# EAGLE board Main Board v34 (EAGLE 9.7.0), part 1 of 2
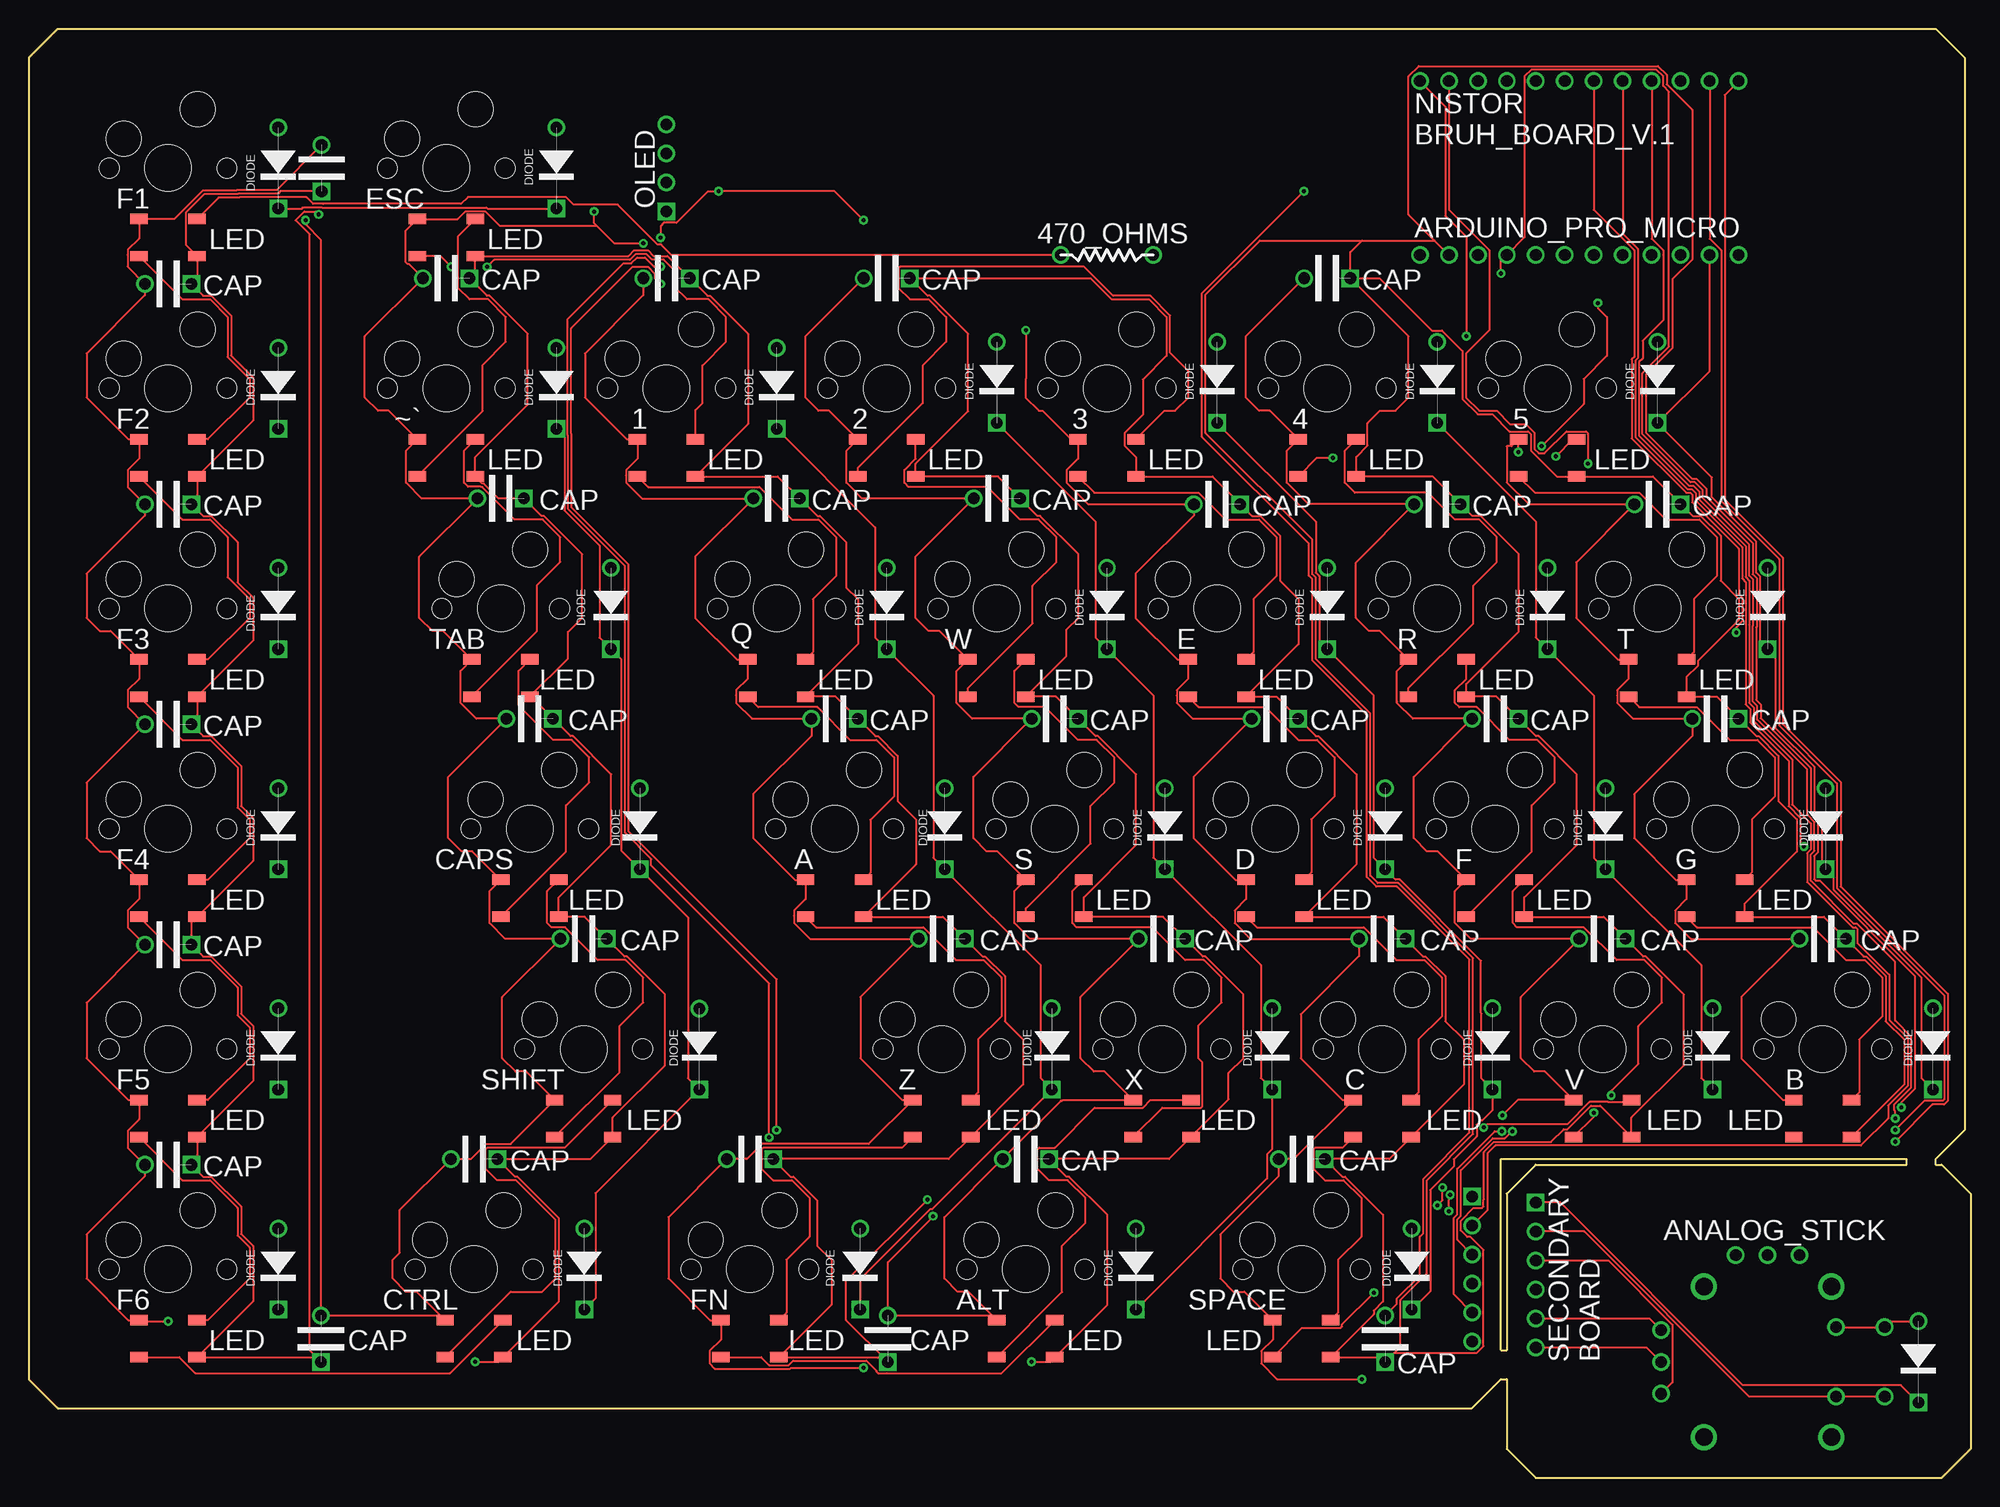
[diagram p0: board, top side]
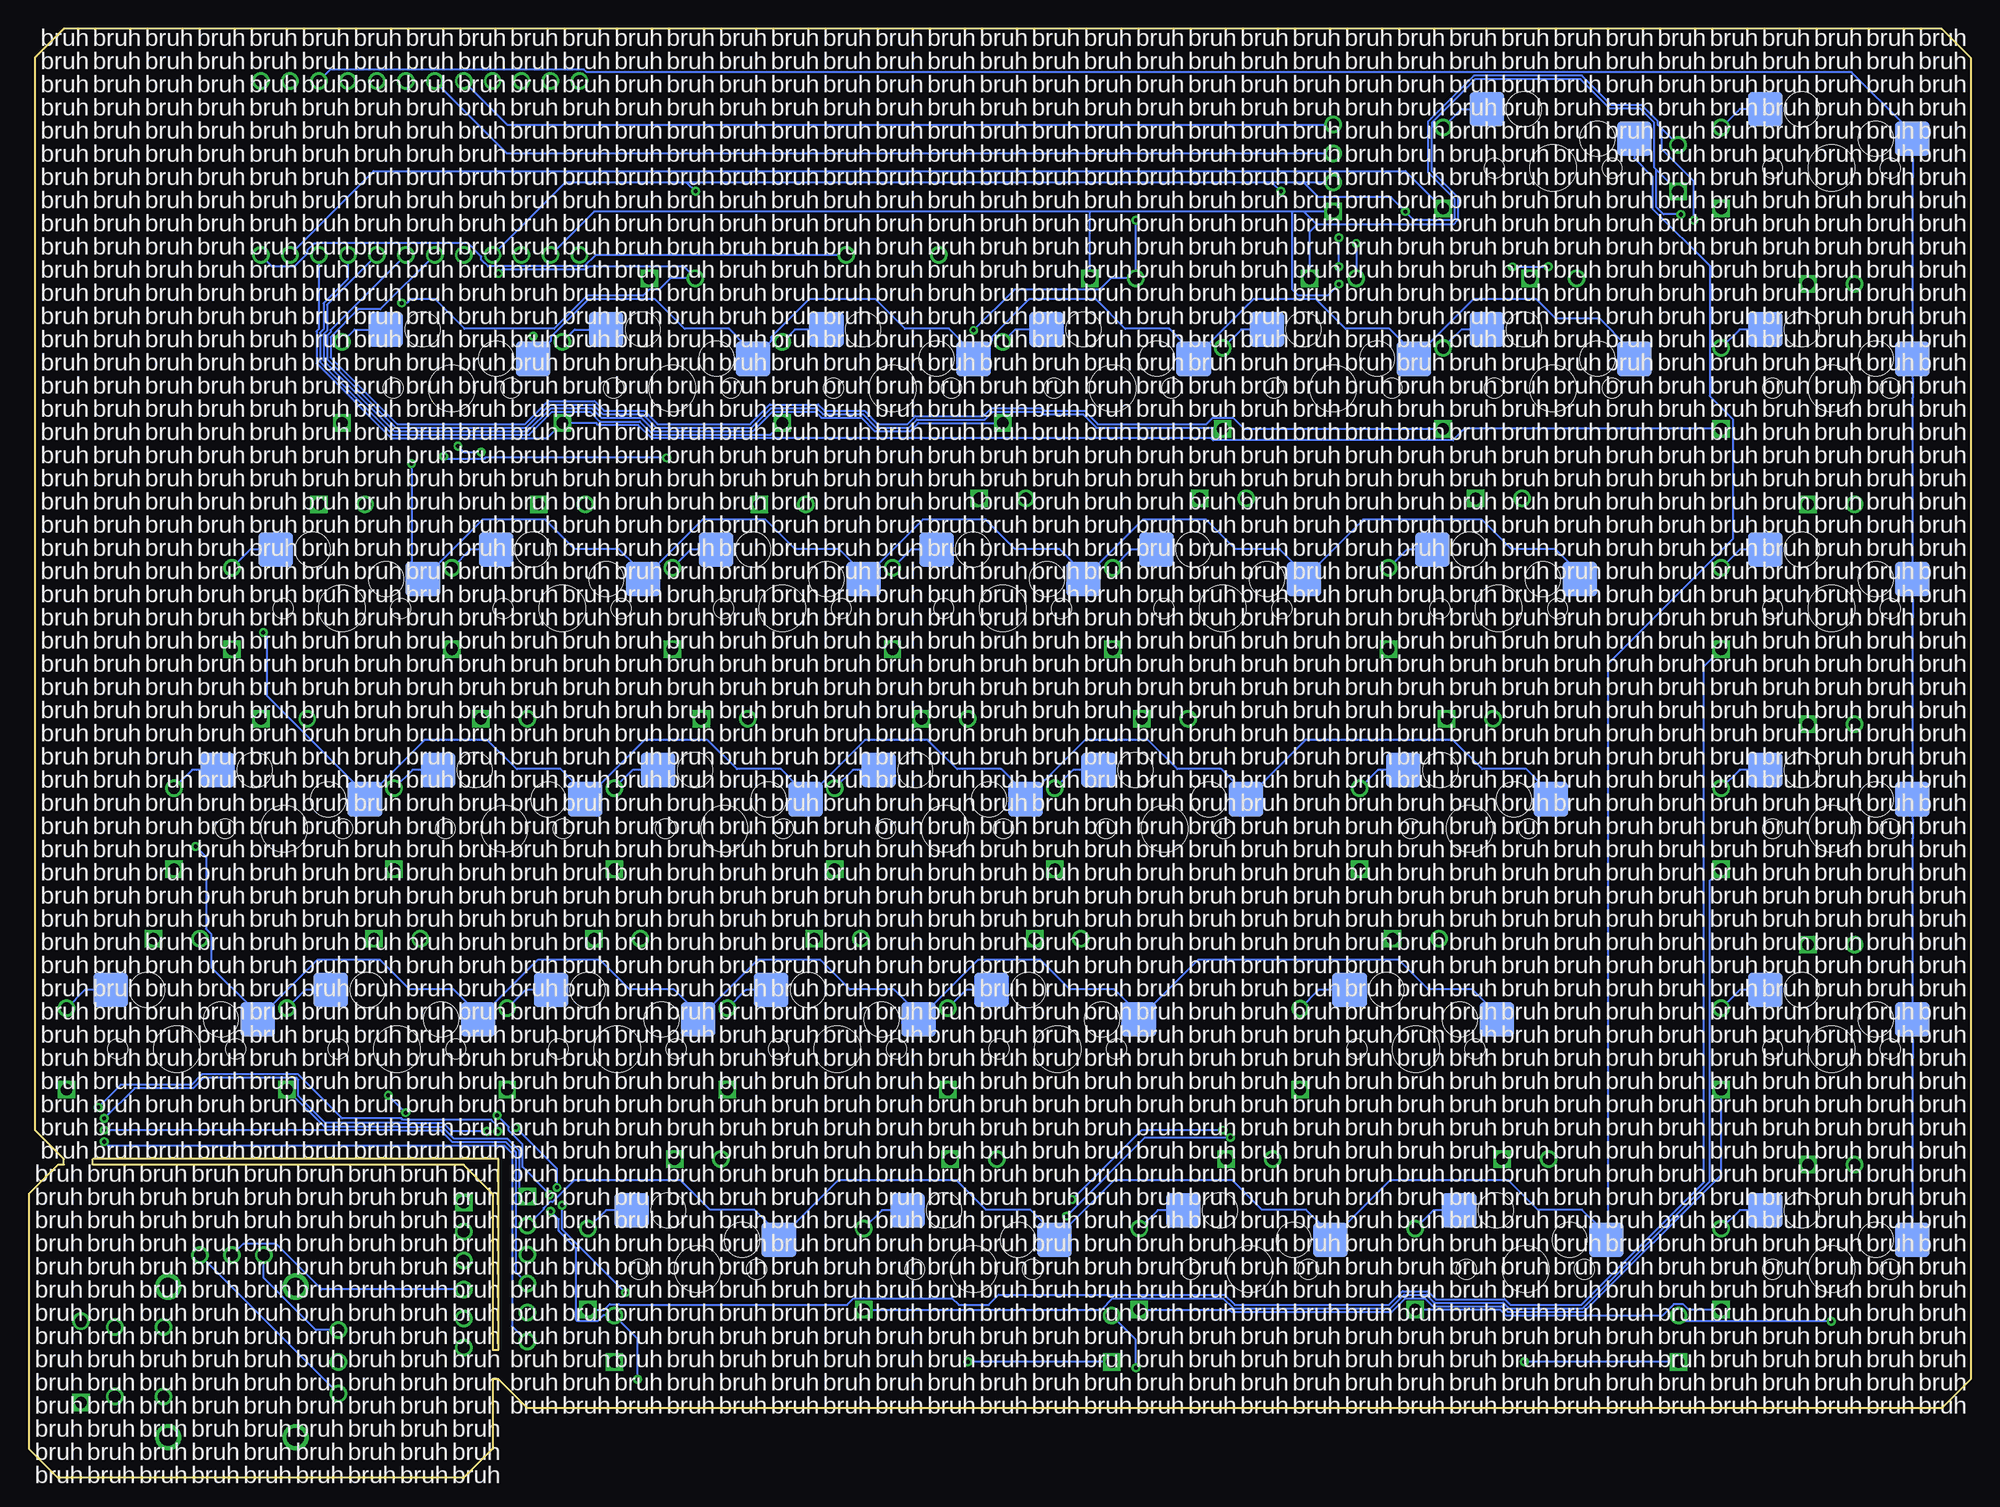
[diagram p1: board, bottom side, seen from below]

Size 167.5 x 125 mm. Coordinates in mm from the lower left corner, seen from the top.
Outline: 0,122.5 0,8.5 2.5,6 124.5,6 127,8.5 127.5,8.5 127.5,2.5 130,0 165,0 167.5,2.5 167.5,24.5 165,27 164.5,27 164.5,27.5 167,30 167,122.5 164.5,125 2.5,125 0,122.5
Outline: 127,11 127,27.5 162,27.5 162,27 130,27 127.5,24.5 127.5,11 127,11
Copper layers (1*16): Top / Bottom
Stack-up Default Layer Stack: Top User Defined 0.035mm / Dielectric-1 User Defined 1.5mm / Bottom User Defined 0.035mm
Design rules "default": minimum track width 6mil, minimum drill 0.35mm, track to track 6mil, track to pad 6mil, pad to pad 6mil, via to via 6mil, smd to smd 6mil, copper to edge 40mil, drill to drill 6mil, minimum pad ring 10mil, minimum via ring 8mil, stop-mask expansion 4mil, vias tented up to drill 0mil, thermal gap 10mil

## Footprints (pad centres in the part's own frame; a part is rotated, then mirrored left to right if it is on the bottom)
HOTSWAP_SWITCH = smd 3 x 3 bottom: LEFT -6.985,2.54; RIGHT 5.715,5.08 | hole 4: 0,0 | hole 1.7: 5.08,0; -5.08,0 | hole 3: 2.54,5.08; -3.81,2.54
ARDUINO_PRO_MICRO = drill 1: 7 22.5,0; A0/18 17.5,15; A1/19 15,15; A2/20 12.5,15; A3/21 10,15; A6/4 15,0; A7/PWM/6 20,0; A8/8 25,0; A9/PWM/9 27.5,0; A10/PWM/10 27.5,15; GND0 5,0; GND1 7.5,0; GND2 2.5,15; MISO/14 22.5,15; MOSI/16 25,15; PWM/5 17.5,0; RAW 0,15; RST 5,15; RX/0 2.5,0; SCL/PWM/3 12.5,0; SCLK/15 20,15; SDA/2 10,0; TX/1 0,0; VCC 7.5,15
ANALOG_STICK = drill 1: BTN1 -3,-5.9; BTN2 -3,-10.1; BTN3 3,-10.1; BTN4 3,-5.9; GND 9.2,2.75; GND1 2.75,9.2; VCC 9.2,-2.75; VCC1 -2.75,9.2; X_AXIS 0,9.2; Y_AXIS 9.2,0 | drill 1.5: P$12 -6.5,-5.5; P$13 6.5,-5.5; P$14 6.5,5.5; P$15 -6.5,5.5
CAPACITOR = drill 1: P$1 -2,0 | drill 1 square: P$2 2,0
DIODE = drill 1: ANNODE -3.5,0 | drill 1 square: CATHODE 3.5,0
5_PIN_HEADER = drill 1: P$1 0,-6.25; P$2 0,-3.75; P$3 0,-1.25; P$4 0,1.25; P$5 0,3.75 | drill 1 square: P$6 0,6.25
WS2812B = smd 1.5 x 0.9: DIN 2.5,1.6; DOUT -2.5,-1.6; GND 2.5,-1.6; VCC -2.5,1.6
RESISTOR = drill 1: P$1 -4,0; P$2 4,0
OLED_I2C = drill 1 square: GND 0,0 | drill 1: SCL 0,5; SDA 0,7.5; VCC 0,2.5

## Placement (x,y rotation side)
1  HOTSWAP_SWITCH  [HOTSWAP_SWITCH]  55,94 0 top
2  HOTSWAP_SWITCH  [HOTSWAP_SWITCH]  74,94 0 top
3  HOTSWAP_SWITCH  [HOTSWAP_SWITCH]  93,94 0 top
4  HOTSWAP_SWITCH  [HOTSWAP_SWITCH]  112,94 0 top
5  HOTSWAP_SWITCH  [HOTSWAP_SWITCH]  131,94 0 top
A  HOTSWAP_SWITCH  [HOTSWAP_SWITCH]  69.5,56 0 top
ALT  HOTSWAP_SWITCH  [HOTSWAP_SWITCH]  86,18 0 top
B  HOTSWAP_SWITCH  [HOTSWAP_SWITCH]  154.75,37 0 top
C  HOTSWAP_SWITCH  [HOTSWAP_SWITCH]  116.75,37 0 top
CAPS  HOTSWAP_SWITCH  [HOTSWAP_SWITCH]  43.2,56 0 top
CTRL  HOTSWAP_SWITCH  [HOTSWAP_SWITCH]  38.4,18 0 top
D  HOTSWAP_SWITCH  [HOTSWAP_SWITCH]  107.5,56 0 top
E  HOTSWAP_SWITCH  [HOTSWAP_SWITCH]  102.5,75 0 top
ESC  HOTSWAP_SWITCH  [HOTSWAP_SWITCH]  36,113 0 top
F  HOTSWAP_SWITCH  [HOTSWAP_SWITCH]  126.5,56 0 top
F1  HOTSWAP_SWITCH  [HOTSWAP_SWITCH]  12,113 0 top
F2  HOTSWAP_SWITCH  [HOTSWAP_SWITCH]  12,94 0 top
F3  HOTSWAP_SWITCH  [HOTSWAP_SWITCH]  12,75 0 top
F4  HOTSWAP_SWITCH  [HOTSWAP_SWITCH]  12,56 0 top
F5  HOTSWAP_SWITCH  [HOTSWAP_SWITCH]  12,37 0 top
F6  HOTSWAP_SWITCH  [HOTSWAP_SWITCH]  12,18 0 top
FN  HOTSWAP_SWITCH  [HOTSWAP_SWITCH]  62.2,18 0 top
G  HOTSWAP_SWITCH  [HOTSWAP_SWITCH]  145.5,56 0 top
NISTOR  [ARDUINO_PRO_MICRO]  120,120.5 180 bottom
Q  HOTSWAP_SWITCH  [HOTSWAP_SWITCH]  64.5,75 0 top
R  HOTSWAP_SWITCH  [HOTSWAP_SWITCH]  121.5,75 0 top
S  HOTSWAP_SWITCH  [HOTSWAP_SWITCH]  88.5,56 0 top
SHIFT  HOTSWAP_SWITCH  [HOTSWAP_SWITCH]  47.85,37 0 top
SPACE  HOTSWAP_SWITCH  [HOTSWAP_SWITCH]  109.8,18 0 top
T  HOTSWAP_SWITCH  [HOTSWAP_SWITCH]  140.5,75 0 top
TAB  HOTSWAP_SWITCH  [HOTSWAP_SWITCH]  40.7,75 0 top
U$1  ANALOG_STICK  [ANALOG_STICK]  150,10 90 top
U$2  CAPACITOR  [CAPACITOR]  25.25,113 270 top
U$4  CAPACITOR  [CAPACITOR]  12,103 0 top
U$5  CAPACITOR  [CAPACITOR]  12,84 0 top
U$6  CAPACITOR  [CAPACITOR]  12,65 0 top
U$7  CAPACITOR  [CAPACITOR]  12,46 0 top
U$8  DIODE  [DIODE]  45.5,94 270 top
U$9  DIODE  [DIODE]  50.2,75 270 top
U$10  DIODE  [DIODE]  52.7,56 270 top
U$11  DIODE  [DIODE]  57.83,36.99 270 top
U$12  DIODE  [DIODE]  47.9,18 270 top
U$13  DIODE  [DIODE]  21.5,18 270 top
U$14  CAPACITOR  [CAPACITOR]  12,27 0 top
U$15  CAPACITOR  [CAPACITOR]  25.2,12 270 top
U$16  CAPACITOR  [CAPACITOR]  38.4,27.5 0 top
U$17  CAPACITOR  [CAPACITOR]  47.85,46.5 0 top
U$18  CAPACITOR  [CAPACITOR]  43.2,65.5 0 top
U$19  CAPACITOR  [CAPACITOR]  40.7,84.5 0 top
U$20  DIODE  [DIODE]  64.5,94 270 top
U$21  DIODE  [DIODE]  74,75 270 top
U$22  DIODE  [DIODE]  79,56 270 top
U$23  DIODE  [DIODE]  88.25,37 270 top
U$24  DIODE  [DIODE]  71.7,18 270 top
U$25  DIODE  [DIODE]  21.5,37 270 top
U$26  CAPACITOR  [CAPACITOR]  36,103.5 0 top
U$27  CAPACITOR  [CAPACITOR]  55,103.5 0 top
U$28  CAPACITOR  [CAPACITOR]  64.5,84.5 0 top
U$29  CAPACITOR  [CAPACITOR]  69.5,65.5 0 top
U$30  CAPACITOR  [CAPACITOR]  78.75,46.5 0 top
U$31  CAPACITOR  [CAPACITOR]  62.2,27.5 0 top
U$32  DIODE  [DIODE]  83.5,94.5 270 top
U$33  DIODE  [DIODE]  93,75 270 top
U$34  DIODE  [DIODE]  98,56 270 top
U$35  DIODE  [DIODE]  107.25,37 270 top
U$36  DIODE  [DIODE]  95.5,18 270 top
U$37  DIODE  [DIODE]  21.5,56 270 top
U$38  CAPACITOR  [CAPACITOR]  74.1,12 270 top
U$39  CAPACITOR  [CAPACITOR]  86,27.5 0 top
U$40  CAPACITOR  [CAPACITOR]  97.75,46.5 0 top
U$41  CAPACITOR  [CAPACITOR]  88.5,65.5 0 top
U$42  CAPACITOR  [CAPACITOR]  83.5,84.5 0 top
U$43  CAPACITOR  [CAPACITOR]  74,103.5 0 top
U$44  DIODE  [DIODE]  102.5,94.5 270 top
U$45  DIODE  [DIODE]  112,75 270 top
U$46  DIODE  [DIODE]  117,56 270 top
U$47  DIODE  [DIODE]  126.25,37 270 top
U$48  DIODE  [DIODE]  119.3,18 270 top
U$49  DIODE  [DIODE]  21.5,75 270 top
U$50  CAPACITOR  [CAPACITOR]  102.5,84 0 top
U$51  CAPACITOR  [CAPACITOR]  107.5,65.5 0 top
U$52  CAPACITOR  [CAPACITOR]  116.75,46.5 0 top
U$53  CAPACITOR  [CAPACITOR]  109.8,27.5 0 top
U$54  5_PIN_HEADER  [5_PIN_HEADER]  124.5,18 0 top
U$55  CAPACITOR  [CAPACITOR]  117,12 270 top
U$56  DIODE  [DIODE]  121.5,94.5 270 top
U$57  DIODE  [DIODE]  131,75 270 top
U$58  DIODE  [DIODE]  136,56 270 top
U$59  DIODE  [DIODE]  145.25,37 270 top
U$60  DIODE  [DIODE]  163,10 270 top
U$61  DIODE  [DIODE]  21.5,94 270 top
U$62  CAPACITOR  [CAPACITOR]  135.75,46.5 0 top
U$63  CAPACITOR  [CAPACITOR]  126.5,65.5 0 top
U$64  CAPACITOR  [CAPACITOR]  121.5,84 0 top
U$65  CAPACITOR  [CAPACITOR]  112,103.5 0 top
U$66  CAPACITOR  [CAPACITOR]  140.5,84 0 top
U$67  CAPACITOR  [CAPACITOR]  145.5,65.5 0 top
U$68  DIODE  [DIODE]  140.5,94.5 270 top
U$69  DIODE  [DIODE]  150,75 270 top
U$70  DIODE  [DIODE]  155,56 270 top
U$71  DIODE  [DIODE]  164.25,37 270 top
U$72  DIODE  [DIODE]  45.5,113 270 top
U$73  DIODE  [DIODE]  21.5,113 270 top
U$74  CAPACITOR  [CAPACITOR]  154.75,46.5 0 top
U$75  WS2812B  [WS2812B]  12,107 0 top
U$76  WS2812B  [WS2812B]  12,88 0 top
U$77  WS2812B  [WS2812B]  12,69 0 top
U$78  WS2812B  [WS2812B]  12,50 0 top
U$79  WS2812B  [WS2812B]  12,31 0 top
U$80  WS2812B  [WS2812B]  12,12 0 top
U$81  WS2812B  [WS2812B]  38.4,12 0 top
U$82  WS2812B  [WS2812B]  47.85,31 0 top
U$83  WS2812B  [WS2812B]  43.2,50 0 top
U$84  WS2812B  [WS2812B]  40.7,69 0 top
U$85  WS2812B  [WS2812B]  36,88 0 top
U$86  WS2812B  [WS2812B]  36,107 0 top
U$87  WS2812B  [WS2812B]  55,88 0 top
U$88  WS2812B  [WS2812B]  64.5,69 0 top
U$89  WS2812B  [WS2812B]  69.5,50 0 top
U$90  WS2812B  [WS2812B]  78.75,31 0 top
U$91  WS2812B  [WS2812B]  62.2,12 0 top
U$92  WS2812B  [WS2812B]  86,12 0 top
U$93  WS2812B  [WS2812B]  97.75,31 0 top
U$94  WS2812B  [WS2812B]  88.5,50 0 top
U$95  WS2812B  [WS2812B]  83.5,69 0 top
U$96  WS2812B  [WS2812B]  74,88 0 top
U$97  WS2812B  [WS2812B]  93,88 0 top
U$98  WS2812B  [WS2812B]  102.5,69 0 top
U$99  WS2812B  [WS2812B]  107.5,50 0 top
U$100  WS2812B  [WS2812B]  116.75,31 0 top
U$101  WS2812B  [WS2812B]  109.8,12 0 top
U$102  WS2812B  [WS2812B]  135.75,31 0 top
U$103  WS2812B  [WS2812B]  126.5,50 0 top
U$104  WS2812B  [WS2812B]  121.5,69 0 top
U$105  WS2812B  [WS2812B]  112,88 0 top
U$106  WS2812B  [WS2812B]  131,88 0 top
U$107  WS2812B  [WS2812B]  140.5,69 0 top
U$108  WS2812B  [WS2812B]  145.5,50 0 top
U$109  WS2812B  [WS2812B]  154.75,31 0 top
U$110  RESISTOR  [RESISTOR]  93,105.5 180 top
U$111  OLED_I2C  [OLED_I2C]  55,109.25 0 top
U$112  5_PIN_HEADER  [5_PIN_HEADER]  130,17.5 0 top
V  HOTSWAP_SWITCH  [HOTSWAP_SWITCH]  135.75,37 0 top
W  HOTSWAP_SWITCH  [HOTSWAP_SWITCH]  83.5,75 0 top
X  HOTSWAP_SWITCH  [HOTSWAP_SWITCH]  97.75,37 0 top
Z  HOTSWAP_SWITCH  [HOTSWAP_SWITCH]  78.75,37 0 top
~  HOTSWAP_SWITCH  [HOTSWAP_SWITCH]  36,94 0 top

## Library data of the parts
1-5 A ALT B C CAPS CTRL D E ESC F F1-F6 FN G NISTOR Q R S SHIFT SPACE T TAB U$1 U$2 U$4-U$112 V W X Z ~ = Keyboard Parts Library

## Nets
N$1: U$8.ANNODE ~.RIGHT
N$2: TAB.RIGHT U$9.ANNODE
N$3: CAPS.RIGHT U$10.ANNODE
N$4: SHIFT.RIGHT U$11.ANNODE
N$5: CTRL.RIGHT U$12.ANNODE
N$6: F6.RIGHT U$13.ANNODE
N$7: 1.RIGHT U$20.ANNODE
N$8: Q.RIGHT U$21.ANNODE
N$9: A.RIGHT U$22.ANNODE
N$10: U$23.ANNODE Z.RIGHT
N$11: FN.RIGHT U$24.ANNODE
N$12: F5.RIGHT U$25.ANNODE
N$13: 2.RIGHT U$32.ANNODE
N$14: U$33.ANNODE W.RIGHT
N$15: S.RIGHT U$34.ANNODE
N$16: U$35.ANNODE X.RIGHT
N$17: ALT.RIGHT U$36.ANNODE
N$18: F4.RIGHT U$37.ANNODE
N$19: 3.RIGHT U$44.ANNODE
N$20: E.RIGHT U$45.ANNODE
N$21: D.RIGHT U$46.ANNODE
N$22: C.RIGHT U$47.ANNODE
N$23: SPACE.RIGHT U$48.ANNODE
N$24: F3.RIGHT U$49.ANNODE
N$25: 4.RIGHT U$56.ANNODE
N$26: R.RIGHT U$57.ANNODE
N$27: F.RIGHT U$58.ANNODE
N$28: U$59.ANNODE V.RIGHT
N$29: U$1.BTN1 U$1.BTN2 U$112.P$5
N$30: F2.RIGHT U$61.ANNODE
N$31: 5.RIGHT U$68.ANNODE
N$32: T.RIGHT U$69.ANNODE
N$33: G.RIGHT U$70.ANNODE
N$34: B.RIGHT U$71.ANNODE
N$35: ESC.RIGHT U$72.ANNODE
N$36: F1.RIGHT U$73.ANNODE
N$37: NISTOR.A2/20 U$8.CATHODE U$9.CATHODE U$10.CATHODE U$11.CATHODE U$12.CATHODE U$13.CATHODE
N$38: NISTOR.A1/19 U$20.CATHODE U$21.CATHODE U$22.CATHODE U$23.CATHODE U$24.CATHODE U$25.CATHODE
N$39: NISTOR.A0/18 U$32.CATHODE U$33.CATHODE U$34.CATHODE U$35.CATHODE U$36.CATHODE U$37.CATHODE
N$40: NISTOR.SCLK/15 U$44.CATHODE U$45.CATHODE U$46.CATHODE U$47.CATHODE U$48.CATHODE U$49.CATHODE
N$41: NISTOR.MISO/14 U$54.P$6 U$56.CATHODE U$57.CATHODE U$58.CATHODE U$59.CATHODE U$61.CATHODE
N$42: NISTOR.MOSI/16 U$68.CATHODE U$69.CATHODE U$70.CATHODE U$71.CATHODE U$72.CATHODE U$73.CATHODE
N$43: 1.LEFT 2.LEFT 3.LEFT 4.LEFT 5.LEFT NISTOR.TX/1 ~.LEFT
N$44: E.LEFT NISTOR.RX/0 Q.LEFT R.LEFT T.LEFT TAB.LEFT W.LEFT
N$45: A.LEFT CAPS.LEFT D.LEFT F.LEFT G.LEFT NISTOR.A6/4 S.LEFT
N$46: B.LEFT C.LEFT NISTOR.PWM/5 SHIFT.LEFT V.LEFT X.LEFT Z.LEFT
N$47: U$1.X_AXIS U$112.P$1
N$48: F1.LEFT F2.LEFT F3.LEFT F4.LEFT F5.LEFT F6.LEFT NISTOR.7
N$49: NISTOR.VCC U$2.P$1 U$4.P$1 U$5.P$1 U$6.P$1 U$7.P$1 U$14.P$1 U$15.P$1 U$16.P$1 U$17.P$1 U$18.P$1 U$19.P$1 U$26.P$1 U$27.P$1 U$28.P$1 U$29.P$1 U$30.P$1 U$31.P$1 U$38.P$1 U$39.P$1 U$40.P$1 U$41.P$1 U$42.P$1 U$43.P$1 U$50.P$1 U$51.P$1 U$52.P$1 U$53.P$1 U$54.P$4 U$55.P$1 U$62.P$1 U$63.P$1 U$64.P$1 U$65.P$1 U$66.P$1 U$67.P$1 U$74.P$1 U$75.VCC U$76.VCC U$77.VCC U$78.VCC U$79.VCC U$80.VCC U$81.VCC U$82.VCC U$83.VCC U$84.VCC U$85.VCC U$86.VCC U$87.VCC U$88.VCC U$89.VCC U$90.VCC U$91.VCC U$92.VCC U$93.VCC U$94.VCC U$95.VCC U$96.VCC U$97.VCC U$98.VCC U$99.VCC U$100.VCC U$101.VCC U$102.VCC U$103.VCC U$104.VCC U$105.VCC U$106.VCC U$107.VCC U$108.VCC U$109.VCC U$111.VCC
N$50: NISTOR.GND2 U$2.P$2 U$4.P$2 U$5.P$2 U$6.P$2 U$7.P$2 U$14.P$2 U$15.P$2 U$16.P$2 U$17.P$2 U$18.P$2 U$19.P$2 U$26.P$2 U$27.P$2 U$28.P$2 U$29.P$2 U$30.P$2 U$31.P$2 U$38.P$2 U$39.P$2 U$40.P$2 U$41.P$2 U$42.P$2 U$43.P$2 U$50.P$2 U$51.P$2 U$52.P$2 U$53.P$2 U$54.P$2 U$55.P$2 U$62.P$2 U$63.P$2 U$64.P$2 U$65.P$2 U$66.P$2 U$67.P$2 U$74.P$2 U$75.GND U$76.GND U$77.GND U$78.GND U$79.GND U$80.GND U$81.GND U$82.GND U$83.GND U$84.GND U$85.GND U$86.GND U$87.GND U$88.GND U$89.GND U$90.GND U$91.GND U$92.GND U$93.GND U$94.GND U$95.GND U$96.GND U$97.GND U$98.GND U$99.GND U$100.GND U$101.GND U$102.GND U$103.GND U$104.GND U$105.GND U$106.GND U$107.GND U$108.GND U$109.GND U$111.GND
N$51: U$75.DOUT U$76.DIN
N$52: U$76.DOUT U$77.DIN
N$53: U$77.DOUT U$78.DIN
N$54: U$78.DOUT U$79.DIN
N$55: U$79.DOUT U$80.DIN
N$56: U$80.DOUT U$81.DIN
N$57: U$81.DOUT U$82.DIN
N$58: U$82.DOUT U$83.DIN
N$59: U$83.DOUT U$84.DIN
N$60: U$84.DOUT U$85.DIN
N$61: U$85.DOUT U$86.DIN
N$62: U$86.DOUT U$87.DIN
N$63: U$87.DOUT U$88.DIN
N$64: U$88.DOUT U$89.DIN
N$65: U$89.DOUT U$90.DIN
N$66: U$90.DOUT U$91.DIN
N$67: U$91.DOUT U$92.DIN
N$68: U$92.DOUT U$93.DIN
N$69: U$93.DOUT U$94.DIN
N$70: U$94.DOUT U$95.DIN
N$71: U$95.DOUT U$96.DIN
N$72: U$96.DOUT U$97.DIN
N$73: U$97.DOUT U$98.DIN
N$74: U$98.DOUT U$99.DIN
N$75: U$99.DOUT U$100.DIN
N$76: U$100.DOUT U$101.DIN
N$77: U$101.DOUT U$102.DIN
N$78: U$102.DOUT U$103.DIN
N$79: U$103.DOUT U$104.DIN
N$80: U$104.DOUT U$105.DIN
N$81: U$105.DOUT U$106.DIN
N$82: U$106.DOUT U$107.DIN
N$83: U$107.DOUT U$108.DIN
N$84: U$108.DOUT U$109.DIN
N$85: U$75.DIN U$110.P$2
N$86: NISTOR.A10/PWM/10 U$110.P$1
N$87: NISTOR.SCL/PWM/3 U$111.SCL
N$88: NISTOR.SDA/2 U$111.SDA
N$89: ALT.LEFT CTRL.LEFT ESC.LEFT FN.LEFT NISTOR.A7/PWM/6 SPACE.LEFT U$54.P$5
N$90: U$1.GND U$1.GND1 U$112.P$2
N$91: NISTOR.A9/PWM/9 U$54.P$1
N$92: NISTOR.A8/8 U$54.P$3
N$93: U$1.Y_AXIS U$112.P$3
N$94: U$1.VCC U$1.VCC1 U$112.P$4
N$95: U$1.BTN3 U$1.BTN4 U$60.ANNODE
N$96: U$60.CATHODE U$112.P$6

## Tracks (layer width: path | path; a pad name or v marks a point on that pad's centre or on a via)
N$1
  Bottom 0.152: ~.RIGHT 43.92,99.08 U$8.ANNODE
N$2
  Bottom 0.152: TAB.RIGHT 48.62,80.08 U$9.ANNODE
N$3
  Bottom 0.152: CAPS.RIGHT 51.12,61.08 U$10.ANNODE
N$4
  Bottom 0.152: SHIFT.RIGHT 56.24,42.08 U$11.ANNODE
N$5
  Bottom 0.152: CTRL.RIGHT 46.32,23.08 U$12.ANNODE
N$6
  Bottom 0.152: F6.RIGHT 19.92,23.08 U$13.ANNODE
N$7
  Bottom 0.152: 1.RIGHT 62.92,99.08 U$20.ANNODE
N$8
  Bottom 0.152: Q.RIGHT 72.42,80.08 U$21.ANNODE
N$9
  Bottom 0.152: A.RIGHT 77.42,61.08 U$22.ANNODE
N$10
  Bottom 0.152: Z.RIGHT 86.67,42.08 U$23.ANNODE
N$11
  Bottom 0.152: FN.RIGHT 70.12,23.08 U$24.ANNODE
N$12
  Bottom 0.152: F5.RIGHT 19.92,42.08 U$25.ANNODE
N$13
  Bottom 0.152: 2.RIGHT 82.42,99.08 U$32.ANNODE
N$14
  Bottom 0.152: W.RIGHT 91.42,80.08 U$33.ANNODE
N$15
  Bottom 0.152: S.RIGHT 96.42,61.08 U$34.ANNODE
N$16
  Bottom 0.152: X.RIGHT 105.67,42.08 U$35.ANNODE
N$17
  Bottom 0.152: ALT.RIGHT 93.92,23.08 U$36.ANNODE
N$18
  Bottom 0.152: F4.RIGHT 19.92,61.08 U$37.ANNODE
N$19
  Bottom 0.152: 3.RIGHT 101.42,99.08 U$44.ANNODE
N$20
  Bottom 0.152: E.RIGHT 110.42,80.08 U$45.ANNODE
N$21
  Bottom 0.152: D.RIGHT 115.42,61.08 U$46.ANNODE
N$22
  Bottom 0.152: C.RIGHT 124.67,42.08 U$47.ANNODE
N$23
  Bottom 0.152: SPACE.RIGHT 117.72,23.08 U$48.ANNODE
N$24
  Bottom 0.152: F3.RIGHT 19.92,80.08 U$49.ANNODE
N$25
  Bottom 0.152: 4.RIGHT 120.42,99.08 U$56.ANNODE
N$26
  Bottom 0.152: R.RIGHT 129.42,80.08 U$57.ANNODE
N$27
  Bottom 0.152: F.RIGHT 134.42,61.08 U$58.ANNODE
N$28
  Bottom 0.152: V.RIGHT 143.67,42.08 U$59.ANNODE
N$29
  Top 0.152: U$1.BTN2 U$1.BTN1 148.43,7 134.18,21.25 U$112.P$5
N$30
  Bottom 0.152: F2.RIGHT 19.92,99.08 U$61.ANNODE
N$31
  Bottom 0.152: 5.RIGHT 139.42,99.08 U$68.ANNODE
N$32
  Bottom 0.152: T.RIGHT 148.42,80.08 U$69.ANNODE
N$33
  Bottom 0.152: G.RIGHT 153.42,61.08 U$70.ANNODE
N$34
  Bottom 0.152: B.RIGHT 162.67,42.08 U$71.ANNODE
N$35
  Bottom 0.152: ESC.RIGHT 43.92,118.08 U$72.ANNODE
N$36
  Bottom 0.152: F1.RIGHT 19.92,118.08 U$73.ANNODE
N$37
  Top 0.152: U$12.CATHODE 48.88,15.48 48.88,24.54 U$11.CATHODE 56.85,34.47 56.85,48.35 U$10.CATHODE 51.11,54.09 51.11,70.59 U$9.CATHODE 49.22,72.48 49.22,80.44 46.2,83.46 46.2,89.81 U$8.CATHODE
  Bottom 0.152: U$13.CATHODE 24.31,14.5 24.79,14.98 25.61,14.98 26.6,13.99 40.06,13.99 40.57,14.5 U$12.CATHODE | NISTOR.A2/20 137.19,100.81 139.08,100.81 141.48,98.41 141.48,96.66 135.73,90.91 124.72,90.91 122.73,92.9 118.72,92.9 117.88,92.06 114.43,92.06 113.28,90.91 105.29,90.91 103.6,92.59 99.42,92.59 98.88,92.06 95.43,92.06 94.28,90.91 91.72,90.91 91.02,91.61 85.15,91.61 84.47,92.29 80.11,92.29 79.88,92.06 76.43,92.06 75.28,90.91 65.92,90.91 65.35,91.48 63.65,91.48 62.67,90.5 U$8.CATHODE
N$38
  Top 0.152: U$20.CATHODE 73,82 73,72.5 U$21.CATHODE 78.02,67.48 78.02,53.48 U$22.CATHODE 87.27,44.23 87.27,34.48 U$23.CATHODE 77.93,23.18 77.75,23.18 71.7,17.13 U$24.CATHODE
  Bottom 0.152: U$24.CATHODE 63.94,14.5 63.73,14.3 49.93,14.3 48.75,15.48 47.05,15.48 46.37,14.81 40.44,14.81 39.93,14.3 33.34,14.3 21.5,26.14 U$25.CATHODE | NISTOR.A1/19 141.48,99.02 141.48,98.84 141.79,98.53 141.79,96.53 135.86,90.6 124.59,90.6 122.6,92.59 118.85,92.59 118.01,91.75 114.56,91.75 113.41,90.6 105.16,90.6 103.47,92.29 99.55,92.29 99.01,91.75 95.56,91.75 94.41,90.6 91.59,90.6 90.89,91.31 85.03,91.31 84.35,91.98 80.24,91.98 80.01,91.75 76.56,91.75 75.41,90.6 64.6,90.6 U$20.CATHODE
N$39
  Top 0.152: U$32.CATHODE 92.02,82.48 92.02,72.48 U$33.CATHODE 97,67.5 97,53.5 U$34.CATHODE 106.27,44.23 106.27,34.48 U$35.CATHODE 107.25,28.34 106.82,27.91 106.82,25.82 U$36.CATHODE
  Bottom 0.152: U$36.CATHODE 74.99,14.5 74.01,15.48 64.49,15.48 63.61,14.6 50.06,14.6 48.88,15.79 46.92,15.79 46.25,15.11 40.31,15.11 39.81,14.6 33.47,14.6 22.5,25.57 22.5,51.5 U$37.CATHODE | NISTOR.A0/18 141.79,101.21 141.79,98.96 142.09,98.66 142.09,96.4 135.99,90.3 124.46,90.3 122.47,92.29 118.98,92.29 118.14,91.45 114.68,91.45 113.53,90.3 105.03,90.3 103.35,91.98 99.67,91.98 99.14,91.45 95.68,91.45 94.53,90.3 91.47,90.3 90.77,91 U$32.CATHODE
N$40
  Top 0.152: U$44.CATHODE 111.02,82.48 111.02,78.09 111.32,77.79 111.32,72.18 U$45.CATHODE 116.02,67.48 116.02,53.48 U$46.CATHODE 117.89,51.61 118.25,51.61 125.27,44.59 125.27,40.09 125.31,40.06 125.31,34.44 U$47.CATHODE 126.25,31.7 125.37,30.82 125.25,30.82 124.89,30.47 124.89,29.47 122.91,27.49 122.91,26.86 120.89,24.84 120.89,16.09 U$48.CATHODE
  Bottom 0.152: U$48.CATHODE 117.89,14.5 117.41,14.98 116.59,14.98 116.52,14.91 96.92,14.91 96.35,15.48 95.52,15.48 95.5,15.5 87.87,15.5 87.28,14.91 84.72,14.91 83.84,15.79 64.36,15.79 63.48,14.91 50.19,14.91 49,16.09 46.8,16.09 46.12,15.41 40.19,15.41 39.68,14.91 33.59,14.91 23,25.5 23,70 U$49.CATHODE | NISTOR.SCLK/15 140,103.43 142.09,101.34 142.09,99.09 142.4,98.79 142.4,96.28 136.11,89.99 124.34,89.99 122.35,91.98 119.1,91.98 118.26,91.14 114.81,91.14 113.66,89.99 103.51,89.99 U$44.CATHODE
N$41
  Top 0.152: U$56.CATHODE 130,82.5 130,72.5 U$57.CATHODE 135.02,67.48 135.02,53.48 U$58.CATHODE 144.27,44.23 144.27,34.48 U$59.CATHODE
  Bottom 0.152: U$61.CATHODE 43.67,90.5 44.65,89.52 65.35,89.52 65.52,89.69 113.79,89.69 114.94,90.84 118.39,90.84 118.55,91 U$56.CATHODE 122.81,89.69 136.24,89.69 142.7,96.15 142.7,98.91 142.5,99.11 NISTOR.MISO/14 | U$59.CATHODE 142.06,30.31 135.53,30.31 135.5,30.28 131.85,30.28 130.85,29.28 126.26,29.28 125.22,28.24 125.22,24.97 U$54.P$6
N$42
  Top 0.152: U$71.CATHODE 163.27,34.48 163.27,43.16 155.68,50.75 155.68,51.82 U$70.CATHODE 154.65,52.85 154.65,56.83 154.02,57.47 154.02,61.35 150.68,64.69 150.68,70.82 U$69.CATHODE 149.35,72.15 149.35,77.76 149.02,78.09 149.02,80.79 145.19,84.61 145.19,86.31 U$68.CATHODE 145,95.5 NISTOR.MOSI/16 | U$73.CATHODE 23.57,109.5 23.68,109.61 25.25,109.61 25.27,109.58 39.47,109.58 39.55,109.5 U$72.CATHODE
  Bottom 0.152: NISTOR.MOSI/16 137.77,112.73 48.73,112.73 U$72.CATHODE
N$43  (via drill 0.35)
  Top 0.152: NISTOR.TX/1 122.19,118.31 122.19,108.87 124,107.07 v124,98.5
  Bottom 0.152: ~.LEFT 29.6,97.12 29.6,97.61 31.98,100 35.79,100 37.47,101.67 42.88,101.67 1.LEFT 48.6,97.12 48.6,97.61 50.12,99.13 53.93,99.13 56.47,101.67 61.88,101.67 2.LEFT 67.6,97.12 67.6,97.61 69.12,99.13 72.93,99.13 75.47,101.67 81.22,101.67 84.48,98.41 84.48,98.07 3.LEFT 86.6,97.12 86.6,97.61 88.12,99.13 91.93,99.13 94.47,101.67 100.22,101.67 103.48,98.41 103.48,98.07 4.LEFT 105.6,97.12 105.6,97.61 107.12,99.13 110.93,99.13 113.47,101.67 119.22,101.67 122.48,98.41 122.48,98.07 5.LEFT 124,96.56 v124,98.5
N$44  (via drill 0.35)
  Top 0.152: NISTOR.RX/0 122.5,109.39 125.98,105.91 125.98,99 123.98,96.99 123.98,93.2 125.12,92.06 126.63,92.06 127.78,90.91 129.15,90.91 129.89,90.16 129.89,88.75 130.25,88.39 130.75,88.39 132.64,90.28 134.34,90.28 134.48,90.15 134.48,90.02 134.5,90 v134.5,87.5
  Bottom 0.152: TAB.LEFT 34.3,78.12 34.3,78.61 35.82,80.13 39.63,80.13 42.17,82.67 52.38,82.67 Q.LEFT 58.1,78.12 58.1,78.61 59.62,80.13 63.43,80.13 65.97,82.67 71.38,82.67 W.LEFT 77.1,78.12 77.1,78.61 78.62,80.13 82.43,80.13 84.97,82.67 90.38,82.67 E.LEFT 96.1,78.12 96.1,78.61 97.62,80.13 101.43,80.13 103.97,82.67 109.38,82.67 R.LEFT 115.1,78.12 115.1,78.61 116.62,80.13 120.43,80.13 122.97,82.67 128.38,82.67 T.LEFT 134.1,78.12 134.1,78.61 134.5,79.02 v134.5,87.5
N$45  (via drill 0.35)
  Top 0.152: NISTOR.A6/4 135,109.39 138.48,105.91 138.48,96.71 138.28,96.5 138.28,89.66 142.96,84.98 143.35,84.98 143.48,84.85 143.48,84.16 147.49,80.16 147.49,76.26 147.83,75.93 147.83,73.9 147.28,73.35 v147.28,72.92
  Bottom 0.152: CAPS.LEFT 36.8,59.12 36.8,59.61 38.32,61.13 42.13,61.13 44.67,63.67 57.38,63.67 A.LEFT 63.1,59.12 63.1,59.61 64.62,61.13 68.43,61.13 70.97,63.67 76.38,63.67 S.LEFT 82.1,59.12 82.1,59.61 83.62,61.13 87.43,61.13 89.97,63.67 95.38,63.67 D.LEFT 101.1,59.12 101.1,59.61 102.62,61.13 106.43,61.13 108.97,63.67 114.38,63.67 F.LEFT 120.1,59.12 120.1,59.61 121.62,61.13 125.43,61.13 127.97,63.67 133.38,63.67 G.LEFT 139.1,59.12 139.1,59.61 146.98,67.5 146.98,72.62 v147.28,72.92
N$46  (via drill 0.35)
  Top 0.152: NISTOR.PWM/5 137.5,107.32 138.79,106.03 138.79,96.58 138.59,96.38 138.59,89.79 143.09,85.29 143.47,85.29 143.79,84.97 143.79,84.29 147.8,80.28 147.8,77.59 148.13,77.25 148.13,73.77 148.1,73.74 148.1,66.73 148.48,66.35 148.48,65.16 151.81,61.84 151.81,57.95 152.83,56.93 152.83,54.77 v153.13,54.47
  Bottom 0.152: SHIFT.LEFT 41.45,40.12 41.45,40.61 42.97,42.13 46.78,42.13 49.32,44.67 66.63,44.67 Z.LEFT 72.35,40.12 72.35,40.61 73.87,42.13 77.68,42.13 80.22,44.67 85.63,44.67 X.LEFT 91.35,40.12 91.35,40.61 92.87,42.13 96.68,42.13 99.22,44.67 104.63,44.67 C.LEFT 110.35,40.12 110.35,40.61 111.87,42.13 115.68,42.13 118.22,44.67 123.63,44.67 V.LEFT 129.35,40.12 129.35,40.61 130.87,42.13 134.68,42.13 137.22,44.67 142.63,44.67 B.LEFT 148.35,40.12 148.35,40.61 151.77,44.03 151.77,46.91 152.22,47.36 152.22,53.56 v153.13,54.47
N$47
  Top 0.152: U$112.P$1 139.55,11.25 U$1.X_AXIS
N$48
  Bottom 0.152: F6.LEFT 5.01,36.16 4.98,36.2 4.98,37.8 5.01,37.84 F5.LEFT 5.01,55.16 4.98,55.2 4.98,56.8 5.01,56.84 F4.LEFT 5.01,74.16 4.98,74.2 4.98,75.8 5.01,75.84 F3.LEFT 5.01,93.16 4.98,93.2 4.98,94.8 5.01,94.84 F2.LEFT 5.01,112.16 4.98,112.2 4.98,113.8 5.01,113.84 F1.LEFT 5.6,116.12 5.6,116.61 10.27,121.28 119.39,121.28 119.59,121.48 141.52,121.48 NISTOR.7
N$49  (via drill 0.35)
  Top 0.152: U$2.P$1 21.36,111.11 17.94,111.11 17.88,111.06 15,111.06 12.55,108.6 U$75.VCC 9.5,106.92 8.52,105.94 8.52,105.52 8.5,105.5 8.5,104.5 U$4.P$1 10,102.02 4.98,96.99 4.98,93.2 8.57,89.6 U$76.VCC 9.5,87.92 8.52,86.94 8.52,85.48 U$5.P$1 10,83.02 4.98,77.99 4.98,74.2 6.12,73.06 7.04,73.06 U$77.VCC 9.5,68.92 8.52,67.94 8.52,66.48 U$6.P$1 4.98,59.98 4.98,55.2 6.12,54.06 7.04,54.06 U$78.VCC 9.5,49.92 8.52,48.94 8.52,47.48 U$7.P$1 4.98,40.98 4.98,36.2 8.57,32.6 U$79.VCC 9.5,30.92 8.52,29.94 8.52,28.48 U$14.P$1 10,26.02 4.98,20.99 4.98,17.2 8.57,13.6 U$80.VCC 9.6,13.5 v12,13.5 | v161,31 161,31.64 160.93,31.71 160.93,32.22 162.38,33.67 162.38,38.06 161,39.44 161,44.51 157.72,47.79 157.45,47.79 153.71,51.53 153.71,53.76 154.04,54.09 154.04,56.58 153.41,57.21 153.41,61.1 149.09,65.42 149.09,66.6 148.71,66.98 148.71,73.49 148.74,73.52 148.74,77.51 148.41,77.84 148.41,80.53 144.4,84.54 144.4,85.23 143.73,85.9 143.34,85.9 139.19,90.04 139.19,95.31 141.48,97.59 141.48,119.59 140.98,120.09 140.98,120.91 140.41,121.48 129.59,121.48 129.02,120.91 129.02,107.02 NISTOR.VCC 127,105 v127,103.91 | v23.86,108.5 23.86,108.14 25.2,106.8 U$15.P$1 35.5,14 U$81.VCC 33.44,16.06 32.52,16.06 31.38,17.2 31.38,18.8 32,19.42 32,23.1 U$16.P$1 38.14,27.5 39.44,28.81 41.55,28.81 U$82.VCC 42.89,35.06 41.97,35.06 40.83,36.2 40.83,41.48 U$17.P$1 41.08,46.5 39.72,47.86 39.72,50.62 U$83.VCC 38.24,54.06 37.32,54.06 36.18,55.2 36.18,60.48 U$18.P$1 38.58,65.5 37.22,66.85 37.22,69.62 U$84.VCC 35.74,73.06 34.82,73.06 33.68,74.2 33.68,79.48 U$19.P$1 33.88,84.5 32.52,85.85 32.52,88.62 U$85.VCC 31.04,92.06 30.12,92.06 28.98,93.2 28.98,98.48 U$26.P$1 32.78,104.72 32.66,104.72 32.5,104.88 32.5,107.6 U$86.VCC 36.98,108.6 37.66,109.28 39.34,109.28 40.61,108.02 48.98,108.02
  Top 0.152: 48.98,108.02 48.75,108.25 v48.75,109.25 | U$27.P$1 53,102.02 47.98,96.99 47.98,93.2 51.57,89.6 U$87.VCC 52.5,87.92 51.52,86.94 51.52,86.52 51.5,86.5 51.52,86.48 51.52,85.85 52.88,84.5 U$28.P$1 57.48,79.48 57.48,74.2 61.07,70.6 U$88.VCC 62,68.92 61.02,67.94 61.02,67.52 61,67.5 61.02,67.48 61.02,66.85 62.38,65.5 U$29.P$1 67.5,64.02 62.48,58.99 62.48,55.2 66.07,51.6 U$89.VCC 67,49.92 66.02,48.94 66.02,48.52 66,48.5 66.02,48.48 66.02,47.86 67.38,46.5 U$30.P$1 71.73,41.48 71.73,36.2 75.32,32.6 U$90.VCC 72.44,28.79 63.23,28.79 61.94,27.5 U$31.P$1 55.18,22.48 55.18,17.2 58.77,13.6 U$91.VCC 59.7,11.92 58.72,10.94 58.72,9.86 59.16,9.42 65.67,9.42 65.74,9.49 v72,9.49 | v78,22.57 78,22.5 74.1,18.6 U$38.P$1 83.1,14 U$92.VCC 81.04,16.06 80.12,16.06 78.98,17.2 78.98,22.48 U$39.P$1 89.02,32.52 89.1,32.52 89.18,32.6 U$93.VCC 92.79,35.06 91.87,35.06 90.73,36.2 90.73,41.48 U$40.P$1 86.38,46.5 85.02,47.86 85.02,50.62 U$94.VCC 83.54,54.06 82.62,54.06 81.48,55.2 81.48,60.48 U$41.P$1 81.38,65.5 80.02,66.85 80.02,69.62 U$95.VCC 78.54,73.06 77.62,73.06 76.48,74.2 76.48,79.48 U$42.P$1 71.88,84.5 70.52,85.85 70.52,88.62 U$96.VCC 69.04,92.06 68.12,92.06 66.98,93.2 66.98,98.48 U$43.P$1 | v54.5,107 54.5,108 54.77,108.27 55.85,108.27 58.58,111 v59.5,111 69.5,111 v72,108.5 | v63.86,29.36 63.86,42.64 53.68,52.82 53.68,53.39 51.41,55.66 51.41,78.68 46.5,83.59 46.5,89.93 46.48,89.95 46.48,99.98 51.29,104.79 51.97,104.79 52.47,105.29 53.14,105.29 53.93,104.5 v54.5,104.5 | 48.98,108.02 50.5,106.5 v53,106.5 | v86,99 86,94.83 85.98,94.8 85.98,93.2 87.12,92.06 87.44,92.06 89.9,89.6 U$97.VCC 90.5,87.92 89.52,86.94 89.52,85.85 91.38,84 U$50.P$1 100.5,83.02 95.48,77.99 95.48,74.2 99.07,70.6 U$98.VCC 100,68.92 99.02,67.94 99.02,67.52 99,67.5 99.02,67.48 99.02,66.85 100.38,65.5 U$51.P$1 100.48,60.48 100.48,55.2 104.07,51.6 U$99.VCC 105,49.92 104.02,48.94 104.02,47.86 105.38,46.5 U$52.P$1 114.75,45.02 109.73,39.99 109.73,36.2 113.32,32.6 U$100.VCC 109.15,27.5 U$53.P$1 107.8,26.02 102.78,20.99 102.78,17.2 103.92,16.06 104.84,16.06 U$101.VCC 107.3,11.92 106.32,10.94 106.32,9.86 107.68,8.5 v115,8.5
  Top 0.152: U$55.P$1 118.01,15.01 118.01,15.47 119.98,17.44 119.98,20.79 120.28,21.09 120.28,25.78 124.28,29.78 124.28,44.72 118,51 116.24,51 115.41,51.83 115.41,65.83 110.71,70.53 110.71,77.54 110.41,77.84 110.41,80.59 101.21,89.79 101.21,102.21 v110,111 | U$54.P$4 123.21,20.54 123.21,22.28 123.52,22.59 123.52,26.53 126.27,29.29 127.33,29.29 127.92,29.89 v127.98,29.89 | v122.5,23 122.5,24 122.61,24.11 v122.61,24.41 | v127.11,31.28 128.44,32.6 U$102.VCC 130.79,35.06 129.87,35.06 128.73,36.2 128.73,41.48 U$62.P$1 124.38,46.5 123.02,47.86 123.02,50.62 U$103.VCC 121.54,54.06 120.62,54.06 119.48,55.2 119.48,60.48 U$63.P$1 119.38,65.5 118.02,66.85 118.02,66.98 118,67 118,69.6 U$104.VCC 116.54,73.06 115.62,73.06 114.48,74.2 114.48,78.98 U$64.P$1 110.38,84 108.52,85.85 108.52,88.62 U$105.VCC 107.04,92.06 106.12,92.06 104.98,93.2 104.98,98.48 U$65.P$1 | v135.36,101.36 135.36,100.93 136.13,100.15 136.13,96.8 134.14,94.8 134.14,92.64 v130.5,89 | v128.5,88.5 U$106.VCC 127.9,89 127.5,89 127.5,85.88 129.38,84 U$66.P$1 133.48,78.98 133.48,74.2 137.07,70.6 U$107.VCC 138,68.92 137.02,67.94 137.02,67.52 137,67.5 137.02,67.48 137.02,66.85 138.38,65.5 U$67.P$1 143.5,64.02 138.48,58.99 138.48,55.2 142.07,51.6 U$108.VCC 143,49.92 142.02,48.94 142.02,47.86 143.38,46.5 U$74.P$1 147.73,41.48 147.73,36.2 151.32,32.6 U$109.VCC
  Bottom 0.152: U$111.VCC 57.5,111.75 | 57.5,111.75 60.25,111.75 | 60.25,111.75 110.75,111.75 | 110.75,111.75 121.25,111.75 NISTOR.VCC | 57.5,111.75 56.25,110.5 50,110.5 v48.75,109.25 48.02,108.52 44.65,108.52 44.52,108.65 44.52,110.35 46.8,112.64 46.8,117.02 42.84,120.98 33.53,120.98 30.99,118.44 28.38,118.44 26.98,117.04 26.98,116.73 26.62,116.38 | U$2.P$1 26.62,116.38 | v161,31 158.4,33.6 153.34,33.6 152.46,34.48 144.4,34.48 144.27,34.35 144.27,32.95 141.93,30.61 135.4,30.61 135.38,30.59 131.73,30.59 131.02,29.89 v127.98,29.89 | v12,13.5 24.7,13.5 U$15.P$1 | 26.62,116.38 26.62,114.62 23.86,111.86 v23.86,108.5 | U$38.P$1 72,11.9 v72,9.49 | v54.5,104.5 v54.5,107 | v59.5,111 60.25,111.75 | v78,22.57 71.21,29.36 v63.86,29.36 | v53,106.5 U$27.P$1 | v72,108.5 U$43.P$1 74.17,103.5 75.15,102.52 82.48,102.52 v86,99 | v115,8.5 115,12 U$55.P$1 117.97,14 118.45,13.52 120.15,13.52 120.28,13.65 120.28,19.8 121.81,21.32 121.81,22.31 v122.5,23 | v110,111 110.75,111.75 | v122.61,24.41 122.61,24.5 124.92,26.81 124.92,28.77 126.11,29.96 126.11,30.27 v127.11,31.28 | v127,103.91 126.7,104.21 119.47,104.21 119.18,104.5 111,104.5 U$65.P$1 112.17,103.5 113.15,102.52 113.98,102.52 114.52,101.98 119.34,101.98 122.19,99.13 129.93,99.13 132.47,101.67 134.61,101.67 134.93,101.36 v135.36,101.36 | v130.5,89 130,88.5 v128.5,88.5
N$50  (via drill 0.35)
  Top 0.152: U$2.P$2 21.68,111 21.49,110.81 18.06,110.81 18.01,110.75 15.13,110.75 13.52,109.14 13.52,106.38 U$75.GND 14.5,103.5 U$4.P$2 15.02,101.98 15.74,101.98 17.44,100.28 17.44,96.82 19.33,94.93 19.33,91.23 U$76.GND 14.5,84.5 U$5.P$2 15.02,82.98 15.74,82.98 18,80.72 18,77.26 19.33,75.93 19.33,72.23 U$77.GND 14.5,65.5 U$6.P$2 15.02,63.98 15.74,63.98 18.3,61.41 18.3,57.95 19.33,56.93 19.33,53.23 U$78.GND 14,47.9 U$7.P$2 15.02,44.98 15.74,44.98 18.3,42.41 18.3,40.03 19.33,39 19.33,34.23 U$79.GND 14.5,27.5 U$14.P$2 15.02,25.98 15.74,25.98 18.3,23.41 18.3,21.03 19.33,20 19.33,15.23 U$80.GND 24.8,10.4 U$15.P$2 24.22,10.98 24.22,107.28 23,108.5 23.75,109.25 24.75,109.25 v25,109 | 121.25,106.75 119.02,108.98 119.02,120.91 119.9,121.79 140.53,121.79 141.29,121.03 141.29,120.21 143.48,118.02 143.48,105.09 141.79,103.4 141.79,97.47 139.5,95.18 139.5,90.17 143.47,86.2 143.85,86.2 144.7,85.35 144.7,84.67 148.71,80.66 148.71,77.97 149.05,77.63 149.05,73.39 149.02,73.36 149.02,67.11 149.4,66.73 149.4,65.54 153.71,61.23 153.71,57.34 154.34,56.71 154.34,53.96 154.02,53.64 154.02,51.65 154.15,51.52 154.48,51.52 162.69,43.31 162.69,33.54 161.53,32.39 v161.53,31.97 | 121.25,106.75 NISTOR.GND2 | v38.5,10 40.5,10 U$81.GND 45.73,15.23 45.73,22.39 42.14,25.98 41.92,25.98 U$16.P$2 48.45,27.5 U$82.GND 50.35,31.08 54.87,35.6 54.87,41.69 51.59,44.98 51.37,44.98 U$17.P$2 47.95,48.4 U$83.GND 45.7,50.08 50.22,54.6 50.22,60.69 46.94,63.98 46.72,63.98 U$18.P$2 43.3,67.4 U$84.GND 46.5,70.7 46.5,72.97 47.72,74.2 47.72,79.69 44.44,82.98 44.22,82.98 U$19.P$2 40.52,84.5 39.23,85.79 39.11,85.79 U$85.GND 38.5,88.08 43.02,92.6 43.02,98.69 39.74,101.98 39.52,101.98 U$26.P$2 38.5,104 U$86.GND 51.72,105.4 52.21,105.9 53.4,105.9 53.88,105.41 55.09,105.41 U$27.P$2 58.52,101.98 58.74,101.98 62.02,98.69 62.02,90.92 U$87.GND 64.6,86.4 U$28.P$2 68.02,82.98 68.24,82.98 70.5,80.72 70.5,76.83 71.52,75.8 71.52,71.92 U$88.GND 69.6,67.4 U$29.P$2 73.02,63.98 73.24,63.98 74.94,62.28 74.94,58.39 76.52,56.8 76.52,52.92 U$89.GND 78.85,48.4 U$30.P$2 82.27,44.98 82.49,44.98 84.19,43.28 84.19,39.39 85.77,37.8 85.77,33.92 U$90.GND 79.35,27.5 U$31.P$2 65.72,25.98 65.94,25.98 68,23.92 68,20.03 69.22,18.8 69.22,14.92 U$91.GND 73.7,10.4 U$38.P$2 70.5,13.6 70.5,17 v77.5,24
  Top 0.152: v64.5,30 64.5,43 51.72,55.78 51.72,78.8 46.8,83.72 46.8,90.06 46.79,90.08 46.79,99.18 52.09,104.48 53.41,104.48 53.98,103.91 53.98,103.52 v54.5,103 | v86.5,10 88.1,10 U$92.GND 93.02,14.92 93.02,22.69 89.74,25.98 89.52,25.98 U$39.P$2 98.35,27.5 U$93.GND 103.5,32.65 103.5,34.92 104.77,36.2 104.77,41.69 101.49,44.98 101.27,44.98 U$40.P$2 97.85,48.4 U$94.GND 91,50.08 95.52,54.6 95.52,60.69 92.24,63.98 92.02,63.98 U$41.P$2 88.6,67.4 U$95.GND 89.5,70.9 89.5,73.17 90.52,74.2 90.52,79.69 87.24,82.98 87.02,82.98 U$42.P$2 83.6,86.4 U$96.GND 76.5,87.49 81.02,92.01 81.02,98.69 77.74,101.98 77.52,101.98 U$43.P$2 91.57,103.5 93.4,101.67 96.61,101.67 98.13,100.15 98.13,96.8 96.09,94.76 96.09,91.72 94.52,90.15 94.52,89.06 95.5,88.08 U$97.GND 102.1,86.4 U$50.P$2 105.52,82.98 106.24,82.98 107.94,81.28 107.94,77.39 109.52,75.8 109.52,71.92 U$98.GND 107.6,67.4 U$51.P$2 111.02,63.98 111.24,63.98 114.52,60.69 114.52,52.92 U$99.GND 116.85,48.4 U$52.P$2 120.27,44.98 120.49,44.98 122.19,43.28 122.19,39.39 123.77,37.8 123.77,33.92 U$100.GND 117.35,27.5 U$53.P$2 113.32,25.98 113.54,25.98 116.82,22.69 116.82,15.21 116.02,14.41 116.02,14.12 U$101.GND 116.6,10.4 U$55.P$2 | U$55.P$2 118.32,11.32 118.32,15.35 120.59,17.62 120.59,25.66 124.59,29.66 124.59,44.84 118.13,51.31 116.36,51.31 115.71,51.96 115.71,65.96 111.02,70.65 111.02,77.66 110.71,77.97 110.71,80.96 101.52,90.15 101.52,102.09 106.18,106.75 115,106.75 | 115,106.75 121.25,106.75 | U$55.P$2 117.77,10.77 124.91,10.77 125.48,11.34 125.48,19.66 124.37,20.77 124.09,20.77 123.52,21.34 123.52,22.16 124.63,23.27 125.35,23.27 125.48,23.4 125.48,23.98 125.53,24.03 125.53,28.11 126.39,28.97 131.3,28.97 132.41,30.08 132.72,30.08 134.75,32.11 135.54,32.11 U$102.GND 138.25,31.08 142.77,35.6 142.77,41.69 139.49,44.98 139.27,44.98 U$62.P$2 135.85,48.4 U$103.GND 129,50.08 133.52,54.6 133.52,60.69 130.24,63.98 130.02,63.98 U$63.P$2 126.6,67.4 U$104.GND 124,68.49 128.52,73.01 128.52,79.69 125.24,82.98 124.52,82.98 U$64.P$2 121.1,86.4 U$105.GND 114.5,88.08 115.48,89.06 115.48,90.98 116.56,92.06 117.88,92.06 119.02,93.2 119.02,98.48 U$65.P$2
  Top 0.152: U$54.P$2 122.91,15.84 122.91,22.41 123.21,22.71 123.21,26.66 126.45,29.89 v127.08,29.89 | U$65.P$2 114,105.75 115,106.75 | U$65.P$2 116.5,103.5 121.02,98.98 121.91,98.98 123.67,97.22 123.67,93.07 124.99,91.75 126.25,91.75 127.72,90.28 129.34,90.28 129.59,90.03 129.59,88.62 131.81,86.4 U$106.GND 140.1,86.4 U$66.P$2 143.52,82.98 144.24,82.98 145.94,81.28 145.94,77.39 147.52,75.8 147.52,74.02 143.98,70.48 143.98,70.06 143,69.08 U$107.GND 145.6,67.4 U$67.P$2 149.02,63.98 149.24,63.98 150.94,62.28 150.94,58.39 152.52,56.8 152.52,54.02 148,49.5 U$108.GND 154.85,48.4 U$74.P$2 158.27,44.98 158.49,44.98 160.19,43.28 160.19,39.39 161.77,37.8 161.77,33.92 U$109.GND
  Bottom 0.152: U$111.GND 57.5,109.25 | 57.5,109.25 58.5,109.25 | 58.5,109.25 76,109.25 | 76,109.25 118.75,109.25 NISTOR.GND2 | U$2.P$2 27.12,112.88 | 27.12,112.88 27.29,113.04 27.29,116.91 28.5,118.13 31.12,118.13 33.66,120.67 42.72,120.67 46.48,116.91 46.48,116.52 46.5,116.5 46.5,112.76 44.21,110.47 44.21,108.53 44.61,108.12 56.38,108.12 | 56.38,108.12 57.5,109.25 | U$15.P$2 v38.5,10 | v25,109 26.5,109 27.12,109.62 27.12,112.88 | U$27.P$2 57,107.5 56.38,108.12 | v77.5,24 71.5,30 v64.5,30 | v54.5,103 55.5,102 58,102 58.5,102.5 58.5,109.25 | U$38.P$2 v86.5,10 | 76,109.25 U$43.P$2 | v127.08,29.89 127.08,30.36 127.61,30.89 135.25,30.89 135.36,31 140.49,31 144.28,34.79 152.59,34.79 153.47,33.91 159.59,33.91 v161.53,31.97
N$51
  Top 0.152: U$75.DOUT 13.23,101.67 15.61,101.67 17.13,100.15 17.13,96.69 19.02,94.8 19.02,93.2 15.43,89.6 U$76.DIN
N$52
  Top 0.152: U$76.DOUT 13.23,82.67 15.61,82.67 17.13,81.15 17.13,77.69 19.02,75.8 19.02,74.2 15.43,70.6 U$77.DIN
N$53
  Top 0.152: U$77.DOUT 13.23,63.67 15.61,63.67 18,61.29 18,57.83 19.02,56.8 19.02,55.2 15.43,51.6 U$78.DIN
N$54
  Top 0.152: U$78.DOUT 13.23,44.67 15.61,44.67 18,42.29 18,39.9 19.02,38.88 19.02,36.2 15.43,32.6 U$79.DIN
N$55
  Top 0.152: U$79.DOUT 13.23,25.67 15.61,25.67 18,23.29 18,20.9 19.02,19.88 19.02,17.2 15.43,13.6 U$80.DIN
N$56
  Top 0.152: U$80.DOUT 12.98,10.4 14.36,9.02 36.32,9.02 U$81.DIN
N$57
  Top 0.152: U$81.DOUT 41.56,16.06 44.28,16.06 45.42,17.2 45.42,22.26 42.01,25.67 40.4,25.67 39.42,26.65 39.42,28.35 39.57,28.5 46.25,28.5 U$82.DIN
N$58
  Top 0.152: U$82.DOUT 50.94,34.99 50.94,38.97 52.98,41.01 52.98,43.15 51.46,44.67 49.07,44.67 46.26,47.48 45.09,47.48 44.72,47.86 44.72,50.62 U$83.DIN
N$59
  Top 0.152: U$83.DOUT 46.34,54.04 46.34,58.01 48.33,60.01 48.33,62.15 46.81,63.67 45.2,63.67 42.22,66.65 42.22,69.62 U$84.DIN
N$60
  Top 0.152: U$84.DOUT 43.84,73.04 43.84,77.01 45.83,79.01 45.83,81.15 44.31,82.67 41.92,82.67 39.11,85.48 38.99,85.48 38.97,85.5 37.88,85.5 37.52,85.85 37.52,88.62 U$85.DIN
N$61
  Top 0.152: U$85.DOUT 39.14,92.04 39.14,96.01 41.13,98.01 41.13,100.15 39.61,101.67 38,101.67 37.02,102.65 37.02,107.12 U$86.DIN
N$62  (via drill 0.35)
  Top 0.152: U$87.DIN 57.5,92.13 58.09,92.72 58.09,95.97 60.13,98.01 60.13,100.15 58.61,101.67 56.76,101.67 55.61,102.82 55.61,104.25 54.75,105.11 53.76,105.11 53.27,105.59 52.34,105.59 51.84,105.09 40.14,105.09 v39.52,104.47 | v36.41,104.5 35.51,105.4 U$86.DOUT
  Bottom 0.152: v39.52,104.47 38.86,104.47 38.83,104.5 v36.41,104.5
N$63
  Top 0.152: U$87.DOUT 53.42,85.48 63.02,85.48 65.83,82.67 68.11,82.67 69.63,81.15 69.63,77.8 67.64,75.8 67.64,71.24 U$88.DIN
N$64
  Top 0.152: U$88.DOUT 62.92,66.48 68.02,66.48 70.83,63.67 73.11,63.67 74.63,62.15 74.63,58.8 72.59,56.76 72.59,52.19 U$89.DIN
N$65
  Top 0.152: U$89.DOUT 67.92,47.48 77.16,47.48 79.97,44.67 82.36,44.67 83.88,43.15 83.88,39.8 81.89,37.8 81.89,33.24 U$90.DIN
N$66
  Top 0.152: U$90.DOUT 75.33,28.48 63.35,28.48 63.22,28.35 63.22,26.65 64.2,25.67 65.81,25.67 67.33,24.15 67.33,20.8 65.34,18.8 65.34,14.24 U$91.DIN
N$67
  Top 0.152: U$91.DOUT 63.18,10.4 63.85,9.72 65.55,9.72 65.92,10.09 72.25,10.09 73.12,9.23 73.12,9.15 73.25,9.02 73.98,9.02 74,9 83.9,9 U$92.DIN
N$68
  Top 0.152: U$92.DOUT 89.14,16.04 89.14,20.01 91.13,22.01 91.13,24.15 89.61,25.67 88,25.67 87.02,26.65 87.02,28.35 87.15,28.48 88.5,28.48 91.94,31.92 96.09,31.92 96.77,32.6 U$93.DIN
N$69
  Top 0.152: U$93.DOUT 97.77,31.92 101.09,31.92 101.23,32.06 101.23,35.86 100.89,36.2 100.89,39.01 102.88,41.01 102.88,43.15 101.36,44.67 99.75,44.67 96.92,47.5 90.38,47.5 90.02,47.86 90.02,50.62 U$94.DIN
N$70
  Top 0.152: U$94.DOUT 86,49.13 91.59,54.72 91.59,57.97 93.63,60.01 93.63,62.15 92.11,63.67 90.5,63.67 87.67,66.5 85.38,66.5 85.02,66.85 85.02,69.62 U$95.DIN
N$71
  Top 0.152: U$95.DOUT 81,68.13 86.59,73.72 86.59,76.97 88.63,79.01 88.63,81.15 87.11,82.67 85.5,82.67 82.69,85.48 75.89,85.48 75.52,85.85 75.52,86.94 76.5,87.92 U$96.DIN
N$72
  Top 0.152: U$96.DOUT 71.5,87.13 77.09,92.72 77.09,95.97 79.13,98.01 79.13,100.15 77.61,101.67 76,101.67 75.02,102.65 75.02,104.35 75.15,104.48 91.02,104.48 93.52,101.98 96.74,101.98 98.44,100.28 98.44,97.06 100.02,95.48 100.02,93.2 98.88,92.06 97.96,92.06 U$97.DIN
N$73
  Top 0.152: U$97.DOUT 91.92,84.98 100.91,84.98 103.22,82.67 106.11,82.67 107.63,81.15 107.63,77.8 105.64,75.8 105.64,71.24 U$98.DIN
N$74
  Top 0.152: U$98.DOUT 100.9,66.5 106.67,66.5 109.5,63.67 111.11,63.67 112.63,62.15 112.63,58.8 110.64,56.8 110.64,52.24 U$99.DIN
N$75
  Top 0.152: U$99.DOUT 105.92,47.48 115.16,47.48 117.97,44.67 120.36,44.67 121.88,43.15 121.88,39.8 119.89,37.8 119.89,33.24 U$100.DIN
N$76
  Top 0.152: U$100.DOUT 113.33,28.48 110.95,28.48 110.82,28.35 110.82,26.65 111.8,25.67 113.41,25.67 114.93,24.15 114.93,20.8 112.94,18.8 112.94,14.24 U$101.DIN
N$77  (via drill 0.35)
  Top 0.152: U$101.DOUT 109.82,12.92 113.14,12.92 113.28,13.06 113.28,13.22 v116.03,15.97 | v121.5,23.5 121.95,23.95 v121.95,25.05 | v125.5,30.22 125.78,30.5 132.71,30.5 134.62,32.41 136.23,32.41 136.25,32.39 138.04,32.39 U$102.DIN
  Bottom 0.152: v116.03,15.97 121.5,21.45 v121.5,23.5 | v121.95,25.05 121.95,26.67 v125.5,30.22
N$78  (via drill 0.35)
  Top 0.152: U$102.DOUT 135,31.15 v135,31.5 | v136.5,33 136.5,33.38 138.84,35.72 138.84,38.97 140.88,41.01 140.88,43.15 139.36,44.67 136.97,44.67 134.14,47.5 128.38,47.5 128.02,47.86 128.02,50.62 U$103.DIN
  Bottom 0.152: v135,31.5 v136.5,33
N$79
  Top 0.152: U$103.DOUT 129.64,54.04 129.64,58.01 131.63,60.01 131.63,62.15 130.11,63.67 127.72,63.67 124.91,66.48 123.39,66.48 123.02,66.85 123.02,67.94 124,68.92 U$104.DIN
N$80
  Top 0.152: U$104.DOUT 119,68.13 124.59,73.72 124.59,76.97 126.63,79.01 126.63,81.15 125.11,82.67 123,82.67 120.67,85 114.38,85 113.52,85.85 113.52,88.62 U$105.DIN
N$81  (via drill 0.35)
  Top 0.152: U$105.DOUT 111.1,88 v112.5,88 | U$106.DIN 133.21,89.6 v131.73,88.13
  Bottom 0.152: v112.5,88 128.14,88 128.25,87.89 131.5,87.89 v131.73,88.13
N$82
  Top 0.152: U$106.DOUT 129.92,84.98 138.91,84.98 141.22,82.67 144.11,82.67 145.63,81.15 145.63,77.8 143.64,75.8 143.64,71.24 U$107.DIN
N$83
  Top 0.152: U$107.DOUT 138.92,66.48 143.91,66.48 146.72,63.67 149.11,63.67 150.63,62.15 150.63,58.8 148.64,56.8 148.64,52.24 U$108.DIN
N$84
  Top 0.152: U$108.DOUT 143.9,47.5 153.92,47.5 156.75,44.67 158.36,44.67 159.88,43.15 159.88,39.8 157.89,37.8 157.89,33.24 U$109.DIN
N$85
  Top 0.152: U$75.DIN 16.35,110.45 18.14,110.45 18.17,110.48 23.94,110.48 24.51,109.91 25.38,109.91 37.28,109.91 37.87,110.5 45.5,110.5 45.52,110.48 46.35,110.48 46.97,109.86 50.78,109.86 54.25,106.39 54.54,106.39 55.43,105.5 U$110.P$2
N$86
  Bottom 0.152: U$110.P$1 118.61,105.5 119.59,104.52 127.91,104.52 128.48,105.09 128.48,105.37 129.61,106.5 142.5,106.5 142.52,106.48 142.91,106.48 143.48,105.91 143.48,105.63 144.61,104.5 146.5,104.5 NISTOR.A10/PWM/10
N$87
  Bottom 0.152: U$111.SCL 126.25,114.25 NISTOR.SCL/PWM/3
N$88
  Bottom 0.152: U$111.SDA 126.25,116.75 NISTOR.SDA/2
N$89
  Top 0.152: NISTOR.A7/PWM/6 140,106.89 140.98,105.91 140.98,105.52 141,105.5 141,99.89 139.21,98.1 139.21,96.58 138.89,96.25 138.89,89.92 143.21,85.59 143.6,85.59 144.09,85.1 144.09,84.42 148.1,80.41 148.1,77.71 148.44,77.38 148.44,73.64 148.41,73.62 148.41,66.85 148.79,66.47 148.79,65.29 152.11,61.97 152.11,58.08 153.74,56.45 153.74,54.22 153.41,53.89 153.41,51.4 157.32,47.48 157.6,47.48 157.73,47.35 157.73,46.17 160.49,43.41 160.49,39.52 162.08,37.93 162.08,33.8 160.39,32.11 160.39,31.02 158.04,28.67 126.52,28.67 125.83,27.98 125.83,23.08 U$54.P$5
  Bottom 0.152: ESC.LEFT 29.02,113.84 27.43,112.26 27.43,109.5 22.5,104.57 22.5,93.33 20.52,91.35 20.52,90.52 20.5,90.5 20.5,81 31.29,70.21 31.29,20.67 CTRL.LEFT 32,21.12 32,21.61 33.52,23.13 37.33,23.13 39.87,25.67 50.08,25.67 FN.LEFT 55.8,21.12 55.8,21.61 57.32,23.13 61.13,23.13 63.67,25.67 73.88,25.67 ALT.LEFT 79.6,21.12 79.6,21.61 81.12,23.13 84.93,23.13 87.47,25.67 97.68,25.67 SPACE.LEFT 103.4,21.12 103.4,21.61 104.92,23.13 108.73,23.13 111.27,25.67 120.47,25.67 122.34,23.8 122.56,23.8 123.11,23.25 123.11,23.14 U$54.P$5
N$90
  Top 0.152: U$112.P$2 139.8,13.75 U$1.GND1
  Bottom 0.152: U$1.GND1 142.75,12.75 147.25,17.25 U$1.GND
N$91  (via drill 0.35)
  Top 0.152: NISTOR.A9/PWM/9 146.29,119.29 146.29,84.38 151.29,79.38 151.29,65.03 156.29,60.03 156.29,51.01 165.54,41.76 165.54,32.53 165.22,32.21 164.21,32.21 v161,29
  Bottom 0.152: v161,29 160.67,28.67 126.52,28.67 125.83,27.98 125.83,13.08 U$54.P$1
N$92  (via drill 0.35)
  Top 0.152: NISTOR.A8/8 145,106.89 145.98,105.91 145.98,84.25 150.98,79.25 150.98,64.91 155.98,59.91 155.98,50.88 165.23,41.63 165.23,32.65 165.1,32.52 163.52,32.52 v161,30
  Bottom 0.152: U$54.P$3 125.53,17.78 125.53,28.11 126.39,28.97 130.97,28.97 131.98,29.98 135.63,29.98 135.65,30 v161,30
N$93
  Bottom 0.152: U$112.P$3 142.25,16.25 146.18,20.18 149.02,20.18 U$1.Y_AXIS
N$94
  Top 0.152: U$112.P$4 136.25,18.75 141.78,13.22 141.78,8.23 U$1.VCC1
  Bottom 0.152: U$1.VCC1 U$1.VCC
N$95
  Top 0.152: U$1.BTN4 U$1.BTN3 160.6,13.5 U$60.ANNODE
N$96
  Top 0.152: U$60.CATHODE 161.5,8 147.86,8 132.11,23.75 U$112.P$6